# Altium PCB PCB.PcbDoc
Units mil, origin at the board's own origin, x right, y up, seen from the top; angles counter-clockwise.
Board outline 6000 x 4000 mil, 2 copper layers (Top Layer, Bottom Layer); 231 components, 132 nets, 529 pads, 0 vias.
Unrouted connection lines stored in the file: 391.
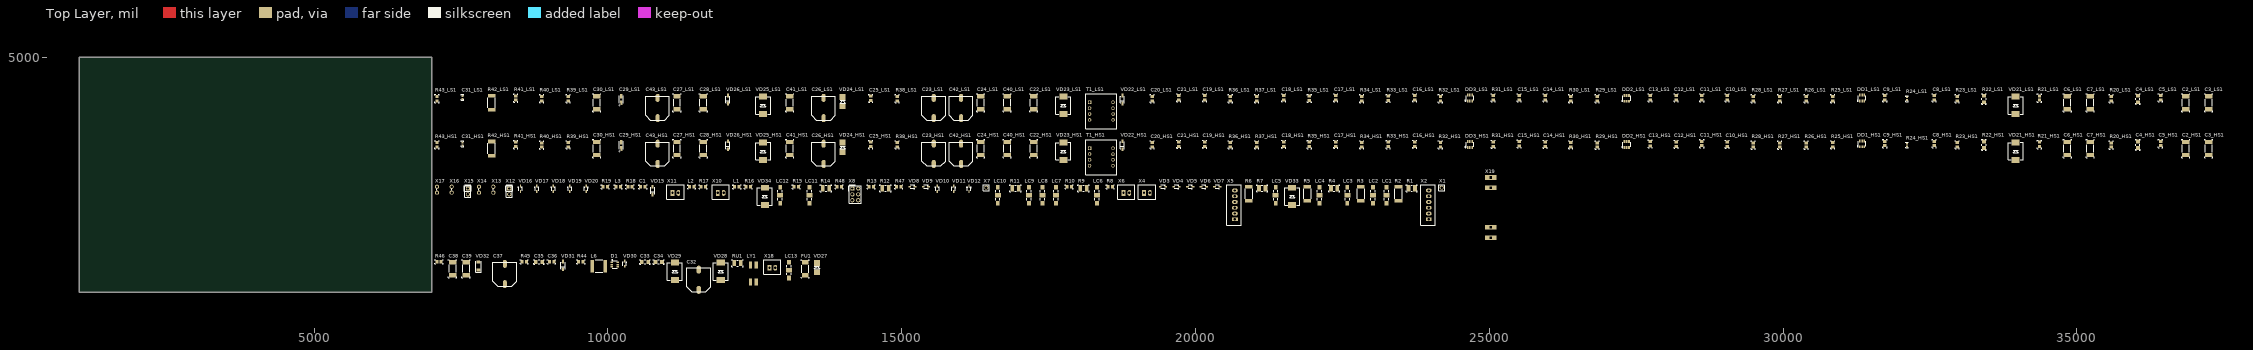
[diagram p0: Top Layer view]
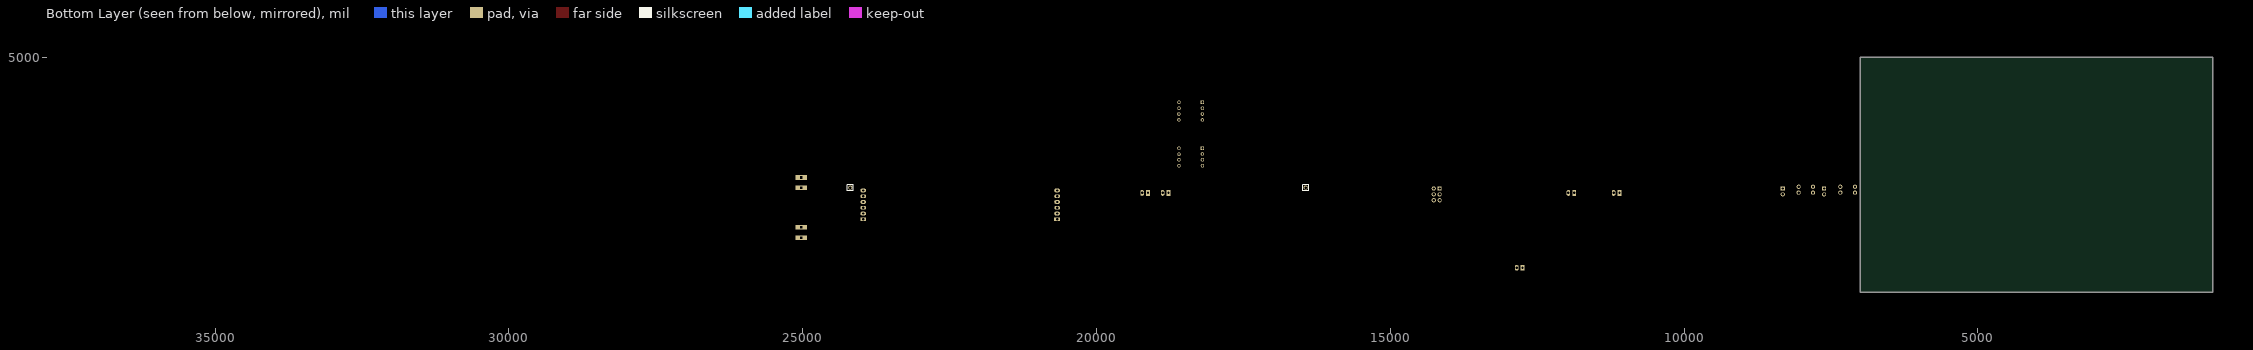
[diagram p1: Bottom Layer view, seen from below]

## Layer stack, top to bottom
Top Solder: solder mask 0.4, Solder Resist, Dk 3.5
Top Layer: signal copper 1.4
Dielectric 1: dielectric 12.6, FR-4, Dk 4.8
Bottom Layer: signal copper 1.4
Bottom Solder: solder mask 0.4, Solder Resist, Dk 3.5

## Board outline
1000,1000 7000,1000 7000,5000 1000,5000

## Design rules (kind name [scope] priority, off if disabled: settings)
Clearance [All] p1: gap=10 ignorepadtopadclearanceinfootprint=FALSE
DiffPairsRouting [All] p1: maxlimit=10 minlimit=10 mostfreqgap=10 toplayer_minwidth=15 toplayer_maxwidth=15 toplayer_prefwidth=15 bottomlayer_minwidth=15 bottomlayer_maxwidth=15 bottomlayer_prefwidth=15 maxuncoupledlength=500
PolygonConnect [All] p1: connectstyle=Relief reliefconductorwidth=10 reliefentries=4 polygonreliefangle="90 Angle" airgapwidth=10
RoutingVias [All] p1: holewidth=28 width=50 viastyle="Through Hole" minholewidth=28 minwidth=50 maxholewidth=28 maxwidth=50
SolderMaskExpansion [All] p1: expansion=4 istentingtop=FALSE
SupplyNets "Schematic Supply Nets_2" [InNet('VCC1_HS1')] p1: voltage=0.000
SupplyNets "Schematic Supply Nets_1" [InNet('+12_HS1')] p2: voltage=0.000
SupplyNets "Schematic Supply Nets" [InNet('GND1')] p3: voltage=0.000
Width [All] p1: maxlimit=10 minlimit=10 preferedwidth=10
29 further rules are at their usual default settings.

## Classes and differential pairs
channel class Gate_Driver: HS1 LS1
component class TOP_LEVEL: C1 L1 L2 L3 LC1 LC2 LC3 LC4 LC5 LC6 LC7 LC8 LC9 LC10 LC11 LC12 R1 R2 R3 R4 R5 R6 R7 R8 R9 R10 R11 R12 R13 R14 R15 R16 R17 R18 R19 R47 R48 VD3 VD4 VD5 VD6 VD7 VD8 VD9 VD10 VD11 VD12 VD15 VD16 VD17 VD18 VD19 VD20 VD33 VD34 X1 X2 X4 X5 X6 X7 X8 X10 X11 X12 X13 X14 X15 X16 X17 X19
component class LS1: C2_LS1 C3_LS1 C4_LS1 C5_LS1 C6_LS1 C7_LS1 C8_LS1 C9_LS1 C10_LS1 C11_LS1 C12_LS1 C13_LS1 C14_LS1 C15_LS1 C16_LS1 C17_LS1 C18_LS1 C19_LS1 C20_LS1 C21_LS1 C22_LS1 C23_LS1 C24_LS1 C25_LS1 C26_LS1 C27_LS1 C28_LS1 C29_LS1 C30_LS1 C31_LS1 C40_LS1 C41_LS1 C42_LS1 C43_LS1 DD1_LS1 DD2_LS1 DD3_LS1 R20_LS1 R21_LS1 R22_LS1 R23_LS1 R24_LS1 R25_LS1 R26_LS1 R27_LS1 R28_LS1 R29_LS1 R30_LS1 R31_LS1 R32_LS1 R33_LS1 R34_LS1 R35_LS1 R36_LS1 R37_LS1 R38_LS1 R39_LS1 R40_LS1 R41_LS1 R42_LS1 R43_LS1 T1_LS1 TP1_LS1 U1_LS1 VD21_LS1 VD22_LS1 VD23_LS1 VD24_LS1 VD25_LS1 VD26_LS1 VT1_LS1 VT2_LS1
component class HS1: C2_HS1 C3_HS1 C4_HS1 C5_HS1 C6_HS1 C7_HS1 C8_HS1 C9_HS1 C10_HS1 C11_HS1 C12_HS1 C13_HS1 C14_HS1 C15_HS1 C16_HS1 C17_HS1 C18_HS1 C19_HS1 C20_HS1 C21_HS1 C22_HS1 C23_HS1 C24_HS1 C25_HS1 C26_HS1 C27_HS1 C28_HS1 C29_HS1 C30_HS1 C31_HS1 C40_HS1 C41_HS1 C42_HS1 C43_HS1 DD1_HS1 DD2_HS1 DD3_HS1 R20_HS1 R21_HS1 R22_HS1 R23_HS1 R24_HS1 R25_HS1 R26_HS1 R27_HS1 R28_HS1 R29_HS1 R30_HS1 R31_HS1 R32_HS1 R33_HS1 R34_HS1 R35_HS1 R36_HS1 R37_HS1 R38_HS1 R39_HS1 R40_HS1 R41_HS1 R42_HS1 R43_HS1 T1_HS1 TP1_HS1 U1_HS1 VD21_HS1 VD22_HS1 VD23_HS1 VD24_HS1 VD25_HS1 VD26_HS1 VT1_HS1 VT2_HS1
component class Designator: C32 C33 C34 C35 C36 C37 C38 C39 D1 FU1 L6 LC13 LY1 R44 R45 R46 RU1 VD27 VD28 VD29 VD30 VD31 VD32 X18
differential pair OCP_LS1: +OCP_LS1_P -OCP_LS1_N
differential pair OCP_HS1: +OCP_HS1_P -OCP_HS1_N
differential pair ISENSE_LS1: +ISENSE_LS1_P -ISENSE_LS1_N
differential pair ISENSE_HS1: +ISENSE_HS1_P -ISENSE_HS1_N

## Components (designator, comment, footprint, x,y, rotation, side; value= is the part's Value field where it differs from the comment)
C1 "10nF" 2012[0805] 10595,2795 r0 top value=0.1
C2_HS1 "1uF" 6332[2512] 36855,3445 r90 top value=0.1 (schematic designator C2)
C2_LS1 "1uF" 6332[2512] 36855,4225 r90 top value=0.1 (schematic designator C2)
C3_HS1 "10uF" 6332[2512] 37245,3445 r90 top value=0.1 (schematic designator C3)
C3_LS1 "10uF" 6332[2512] 37245,4225 r90 top value=0.1 (schematic designator C3)
C4_HS1 "2.2uF" 3216[1206] 36040,3510 r90 top value=0.1 (schematic designator C4)
C4_LS1 "2.2uF" 3216[1206] 36040,4290 r90 top value=0.1 (schematic designator C4)
C5_HS1 "100nF" 2012[0805] 36425,3530 r90 top value=0.1 (schematic designator C5)
C5_LS1 "100nF" 2012[0805] 36425,4310 r90 top value=0.1 (schematic designator C5)
C6_HS1 "1uF" 6332[2512] 34840,3445 r90 top value=0.1 (schematic designator C6)
C6_LS1 "1uF" 6332[2512] 34840,4225 r90 top value=0.1 (schematic designator C6)
C7_HS1 "10uF" 6332[2512] 35230,3445 r90 top value=0.1 (schematic designator C7)
C7_LS1 "10uF" 6332[2512] 35230,4225 r90 top value=0.1 (schematic designator C7)
C8_HS1 "100pF" 2012[0805] 32575,3530 r90 top value=0.1 (schematic designator C8)
C8_LS1 "100pF" 2012[0805] 32575,4310 r90 top value=0.1 (schematic designator C8)
C9_HS1 "100nF" 2012[0805] 31735,3530 r90 top value=0.1 (schematic designator C9)
C9_LS1 "100nF" 2012[0805] 31735,4310 r90 top value=0.1 (schematic designator C9)
C10_HS1 "100nF" 2012[0805] 29050,3520 r90 top value=0.1 (schematic designator C10)
C10_LS1 "100nF" 2012[0805] 29050,4310 r90 top value=0.1 (schematic designator C10)
C11_HS1 "47pF" 2012[0805] 28620,3530 r90 top value=0.1 (schematic designator C11)
C11_LS1 "47pF" 2012[0805] 28620,4310 r90 top value=0.1 (schematic designator C11)
C12_HS1 "47pF" 2012[0805] 28180,3520 r90 top value=0.1 (schematic designator C12)
C12_LS1 "47pF" 2012[0805] 28180,4310 r90 top value=0.1 (schematic designator C12)
C13_HS1 "47pF" 2012[0805] 27740,3525 r90 top value=0.1 (schematic designator C13)
C13_LS1 "47pF" 2012[0805] 27740,4310 r90 top value=0.1 (schematic designator C13)
C14_HS1 "47pF" 2012[0805] 25950,3520 r90 top value=0.1 (schematic designator C14)
C14_LS1 "47pF" 2012[0805] 25950,4310 r90 top value=0.1 (schematic designator C14)
C15_HS1 "47pF" 2012[0805] 25510,3525 r90 top value=0.1 (schematic designator C15)
C15_LS1 "47pF" 2012[0805] 25510,4310 r90 top value=0.1 (schematic designator C15)
C16_HS1 "1nF" 2012[0805] 23730,3520 r90 top value=0.1 (schematic designator C16)
C16_LS1 "1nF" 2012[0805] 23730,4310 r90 top value=0.1 (schematic designator C16)
C17_HS1 "4.7uF" 2012[0805] 22390,3520 r90 top value=0.1 (schematic designator C17)
C17_LS1 "4.7uF" 2012[0805] 22390,4310 r90 top value=0.1 (schematic designator C17)
C18_HS1 "47pF" 2012[0805] 21500,3520 r90 top value=0.1 (schematic designator C18)
C18_LS1 "47pF" 2012[0805] 21500,4310 r90 top value=0.1 (schematic designator C18)
C19_HS1 "47pF" 2012[0805] 20155,3520 r90 top value=0.1 (schematic designator C19)
C19_LS1 "47pF" 2012[0805] 20155,4310 r90 top value=0.1 (schematic designator C19)
C20_HS1 "47pF" 2012[0805] 19265,3510 r90 top value=0.1 (schematic designator C20)
C20_LS1 "47pF" 2012[0805] 19265,4295 r90 top value=0.1 (schematic designator C20)
C21_HS1 "1nF" 2012[0805] 19715,3520 r90 top value=0.1 (schematic designator C21)
C21_LS1 "1nF" 2012[0805] 19715,4310 r90 top value=0.1 (schematic designator C21)
C22_HS1 "4.7uF" 6332[2512] 17245,3445 r90 top value=0.1 (schematic designator C22)
C22_LS1 "4.7uF" 6332[2512] 17245,4225 r90 top value=0.1 (schematic designator C22)
C23_HS1 "220uF" "ECAP 220 50V" 15380,3150 r0 top (schematic designator C23)
C23_LS1 "220uF" "ECAP 220 50V" 15380,3930 r0 top (schematic designator C23)
C24_HS1 "4.7uF" 6332[2512] 16345,3445 r90 top value=0.1 (schematic designator C24)
C24_LS1 "4.7uF" 6332[2512] 16345,4225 r90 top value=0.1 (schematic designator C24)
C25_HS1 "47nF" 2012[0805] 14475,3515 r90 top value=0.1 (schematic designator C25)
C25_LS1 "47nF" 2012[0805] 14475,4300 r90 top value=0.1 (schematic designator C25)
C26_HS1 "220uF" "ECAP 220 50V" 13505,3150 r0 top (schematic designator C26)
C26_LS1 "220uF" "ECAP 220 50V" 13505,3930 r0 top (schematic designator C26)
C27_HS1 "4.7uF" 6332[2512] 11175,3445 r90 top value=0.1 (schematic designator C27)
C27_LS1 "4.7uF" 6332[2512] 11175,4225 r90 top value=0.1 (schematic designator C27)
C28_HS1 "4.7uF" 6332[2512] 11625,3445 r90 top value=0.1 (schematic designator C28)
C28_LS1 "4.7uF" 6332[2512] 11625,4225 r90 top value=0.1 (schematic designator C28)
C29_HS1 "220uF" A(3216) 10225,3500 r90 top (schematic designator C29)
C29_LS1 "220uF" A(3216) 10225,4280 r90 top (schematic designator C29)
C30_HS1 "100nF" 6332[2512] 9810,3445 r90 top value=0.1 (schematic designator C30)
C30_LS1 "100nF" 6332[2512] 9810,4225 r90 top value=0.1 (schematic designator C30)
C31_HS1 "10nF" 1005[0402] 7525,3525 r90 top value=0.1 (schematic designator C31)
C31_LS1 "10nF" 1005[0402] 7525,4315 r90 top value=0.1 (schematic designator C31)
C32 "*" "ECAP 220 50V" 11379.65,1007.05 r0 top
C33 "0.1м" 3216[1206] 10630,1515 r0 top
C34 "0.1м" 3216[1206] 10865,1515 r0 top
C35 "10u" 3216[1206] 8825,1515 r0 top value=0.1м
C36 "0u1" 2012[0805] 9040,1520 r0 top value=0.1м
C37 "220u" "ECAP 220 50V" 8080,1105 r0 top
C38 "10u" 6332[2512] 7355,1400 r90 top value=0.1м
C39 "10u" 6332[2512] 7585,1400 r90 top value=0.1м
C40_HS1 "10uF" 6332[2512] 16795,3445 r90 top value=0.1 (schematic designator C40)
C40_LS1 "10uF" 6332[2512] 16795,4225 r90 top value=0.1 (schematic designator C40)
C41_HS1 "10uF" 6332[2512] 13095,3445 r90 top value=0.1 (schematic designator C41)
C41_LS1 "10uF" 6332[2512] 13095,4225 r90 top value=0.1 (schematic designator C41)
C42_HS1 "220uF" "ECAP 220 50V" 15845,3150 r0 top (schematic designator C42)
C42_LS1 "220uF" "ECAP 220 50V" 15845,3930 r0 top (schematic designator C42)
C43_HS1 "220uF" "ECAP 220 50V" 10680,3150 r0 top (schematic designator C43)
C43_LS1 "220uF" "ECAP 220 50V" 10680,3930 r0 top (schematic designator C43)
D1 "MCP16301HT-E/CH" SOT23-6 10115,1470 r0 top
DD1_HS1 "SN74LVC2G17DBVR" SOT23-6 31345,3525 r90 top (schematic designator DD1)
DD1_LS1 "SN74LVC2G17DBVR" SOT23-6 31345,4305 r90 top (schematic designator DD1)
DD2_HS1 "SN74LVC2G17DBVR" SOT23-6 27340,3515 r90 top (schematic designator DD2)
DD2_LS1 "SN74LVC2G17DBVR" SOT23-6 27340,4300 r90 top (schematic designator DD2)
DD3_HS1 "SN74LVC2G17DBVR" SOT23-6 24670,3515 r90 top (schematic designator DD3)
DD3_LS1 "SN74LVC2G17DBVR" SOT23-6 24670,4305 r90 top (schematic designator DD3)
FU1 "*" 2410 13360,1400 r90 top
L1 "*" 2012[0805] 12195,2795 r0 top
L2 "*" 2012[0805] 11425,2795 r0 top
L3 "600ohm" 2012[0805] 10175,2795 r0 top
L6 "15uH" IND5750 9845,1445 r0 top
LC1 "" NFE61PT102E1H9L 23250,2650 r90 top
LC2 "" NFE61PT102E1H9L 23020,2650 r90 top
LC3 "" NFE61PT102E1H9L 22585,2650 r90 top
LC4 "" NFE61PT102E1H9L 22110,2650 r90 top
LC5 "" NFE61PT102E1H9L 21365,2650 r90 top
LC6 "" NFE61PT102E1H9L 18325,2650 r90 top
LC7 "" NFE61PT102E1H9L 17625,2650 r90 top
LC8 "" NFE61PT102E1H9L 17395,2650 r90 top
LC9 "" NFE61PT102E1H9L 17165,2650 r90 top
LC10 "" NFE61PT102E1H9L 16635,2650 r90 top
LC11 "" NFE61PT102E1H9L 13430,2650 r90 top
LC12 "" NFE61PT102E1H9L 12930,2650 r90 top
LC13 "" NFE61PT102E1H9L 13080,1375 r90 top
LY1 "Value" B82793S0513N201 12475,1315 r90 top
R1 "390k" 3225[1210] 23680,2770 r0 top
R2 "3.3" 2512 23455,2675 r90 top
R3 "3.3" 2512 22815,2675 r90 top
R4 "390k" 3225[1210] 22360,2770 r0 top
R5 "3.3" 2512 21905,2675 r90 top
R6 "3.3" 2512 20910,2675 r90 top
R7 "390k" 3225[1210] 21135,2770 r0 top
R8 "*" 2012[0805] 18550,2795 r0 top
R9 "390k" 3225[1210] 18095,2770 r0 top
R10 "*" 2012[0805] 17850,2795 r0 top
R11 "390k" 3225[1210] 16935,2770 r0 top
R12 "390k" 3225[1210] 14725,2770 r0 top
R13 "3.3" 2012[0805] 14480,2795 r0 top
R14 "390k" 3225[1210] 13710,2770 r0 top
R15 "3.3" 2012[0805] 13205,2795 r0 top
R16 "680" 2012[0805] 12390,2795 r0 top
R17 "23.7k" 2012[0805] 11620,2795 r0 top
R18 "*" 2012[0805] 10375,2795 r0 top
R19 "*" 2012[0805] 9955,2795 r0 top
R20_HS1 "10k" 2012[0805] 35585,3505 r90 top (schematic designator R20)
R20_LS1 "10k" 2012[0805] 35585,4295 r90 top (schematic designator R20)
R21_HS1 "10k" 2012[0805] 34365,3515 r90 top (schematic designator R21)
R21_LS1 "10k" 2012[0805] 34365,4305 r90 top (schematic designator R21)
R22_HS1 "2.2k" 3216[1206] 33420,3510 r90 top (schematic designator R22)
R22_LS1 "2.2k" 3216[1206] 33420,4290 r90 top (schematic designator R22)
R23_HS1 "1k" 2012[0805] 32965,3510 r90 top (schematic designator R23)
R23_LS1 "1k" 2012[0805] 32965,4295 r90 top (schematic designator R23)
R24_HS1 "100k" 1005[0402] 32110,3505 r90 top (schematic designator R24)
R24_LS1 "100k" 1005[0402] 32110,4295 r90 top (schematic designator R24)
R25_HS1 "100" 2012[0805] 30845,3510 r90 top (schematic designator R25)
R25_LS1 "100" 2012[0805] 30845,4295 r90 top (schematic designator R25)
R26_HS1 "4.7k" 2012[0805] 30395,3505 r90 top (schematic designator R26)
R26_LS1 "4.7k" 2012[0805] 30395,4295 r90 top (schematic designator R26)
R27_HS1 "10k" 2012[0805] 29945,3505 r90 top (schematic designator R27)
R27_LS1 "10k" 2012[0805] 29945,4295 r90 top (schematic designator R27)
R28_HS1 "10k" 2012[0805] 29495,3505 r90 top (schematic designator R28)
R28_LS1 "10k" 2012[0805] 29495,4295 r90 top (schematic designator R28)
R29_HS1 "10k" 2012[0805] 26840,3505 r90 top (schematic designator R29)
R29_LS1 "10k" 2012[0805] 26840,4295 r90 top (schematic designator R29)
R30_HS1 "100" 2012[0805] 26390,3510 r90 top (schematic designator R30)
R30_LS1 "100" 2012[0805] 26390,4295 r90 top (schematic designator R30)
R31_HS1 "100" 2012[0805] 25070,3520 r90 top (schematic designator R31)
R31_LS1 "100" 2012[0805] 25070,4310 r90 top (schematic designator R31)
R32_HS1 "100" 2012[0805] 24170,3510 r90 top (schematic designator R32)
R32_LS1 "100" 2012[0805] 24170,4295 r90 top (schematic designator R32)
R33_HS1 "10" 2012[0805] 23280,3515 r90 top (schematic designator R33)
R33_LS1 "10" 2012[0805] 23280,4300 r90 top (schematic designator R33)
R34_HS1 "100" 2012[0805] 22830,3510 r90 top (schematic designator R34)
R34_LS1 "100" 2012[0805] 22830,4295 r90 top (schematic designator R34)
R35_HS1 "10" 2012[0805] 21940,3515 r90 top (schematic designator R35)
R35_LS1 "10" 2012[0805] 21940,4300 r90 top (schematic designator R35)
R36_HS1 "10k" 2012[0805] 20595,3510 r90 top (schematic designator R36)
R36_LS1 "10k" 2012[0805] 20595,4295 r90 top (schematic designator R36)
R37_HS1 "220k" 2012[0805] 21045,3510 r90 top (schematic designator R37)
R37_LS1 "220k" 2012[0805] 21045,4295 r90 top (schematic designator R37)
R38_HS1 "1.2k" 2012[0805] 14925,3510 r90 top (schematic designator R38)
R38_LS1 "1.2k" 2012[0805] 14925,4295 r90 top (schematic designator R38)
R39_HS1 "4.7" 2012[0805] 9325,3510 r90 top (schematic designator R39)
R39_LS1 "4.7" 2012[0805] 9325,4295 r90 top (schematic designator R39)
R40_HS1 "10k" 2012[0805] 8870,3505 r90 top (schematic designator R40)
R40_LS1 "10k" 2012[0805] 8870,4295 r90 top (schematic designator R40)
R41_HS1 "10" 2012[0805] 8430,3515 r90 top (schematic designator R41)
R41_LS1 "10" 2012[0805] 8430,4305 r90 top (schematic designator R41)
R42_HS1 "0.2" 2512 8020,3445 r90 top (schematic designator R42)
R42_LS1 "0.2" 2512 8020,4225 r90 top (schematic designator R42)
R43_HS1 "10" 2012[0805] 7090,3510 r90 top (schematic designator R43)
R43_LS1 "10" 2012[0805] 7090,4295 r90 top (schematic designator R43)
R44 "1М" 2012[0805] 9540,1520 r0 top
R45 "31.2k" 2012[0805] 8575,1520 r0 top
R46 "10k" 2012[0805] 7125,1520 r0 top
R47 "3.3" 2012[0805] 14950,2795 r0 top
R48 "3.3" 2012[0805] 13935,2795 r0 top
RU1 "*" 3225[1210] 12205,1495 r0 top
T1_HS1 "transformer 3coil" "E 13/7/4" 18400,3300 r0 top (schematic designator T1)
T1_LS1 "transformer 3coil" "E 13/7/4" 18400,4080 r0 top (schematic designator T1)
VD3 "*" SOD-323 19445,2795 r0 top
VD4 "*" SOD-323 19675,2795 r0 top
VD5 "*" SOD-323 19910,2795 r0 top
VD6 "*" SOD-323 20140,2795 r0 top
VD7 "PESD3V3L1BA" SOD-323 20370,2795 r0 top
VD8 "*" SOD-323 15180,2795 r0 top
VD9 "*" SOD-323 15410,2795 r0 top
VD10 "*" SOD-323 15605,2760 r90 top
VD11 "*" SOD-323 15885,2760 r90 top
VD12 "PESD3V3L1BA" SOD-323 16145,2760 r90 top
VD15 "*" SOD-123 10760,2730 r90 top
VD16 "*" SOD-323 8510,2760 r90 top
VD17 "*" SOD-323 8790,2760 r90 top
VD18 "*" SOD-323 9070,2760 r90 top
VD19 "*" SOD-323 9350,2760 r90 top
VD20 "PESD3V3L1BA" SOD-323 9630,2760 r90 top
VD21_HS1 "smc" SMС 33960,3400 r90 top (schematic designator VD21)
VD21_LS1 "smc" SMС 33960,4180 r90 top (schematic designator VD21)
VD22_HS1 "STPS1L60ZFY" SOD-123 18755,3500 r90 top (schematic designator VD22)
VD22_LS1 "STPS1L60ZFY" SOD-123 18755,4280 r90 top (schematic designator VD22)
VD23_HS1 "" SMС 17750,3400 r90 top (schematic designator VD23)
VD23_LS1 "" SMС 17750,4180 r90 top (schematic designator VD23)
VD24_HS1 "S1M-E3/61T" SMB 13995,3465 r90 top (schematic designator VD24)
VD24_LS1 "S1M-E3/61T" SMB 13995,4245 r90 top (schematic designator VD24)
VD25_HS1 "" SMС 12640,3400 r90 top (schematic designator VD25)
VD25_LS1 "" SMС 12640,4180 r90 top (schematic designator VD25)
VD26_HS1 "" SOD-123 12040,3500 r90 top (schematic designator VD26)
VD26_LS1 "" SOD-123 12040,4280 r90 top (schematic designator VD26)
VD27 "*" SMB 13560,1420 r90 top
VD28 "*" SMС 11920,1355 r90 top
VD29 "12V" SMС 11140,1355 r90 top
VD30 "1N4448WS" SOD-323 10285,1485 r90 top
VD31 "40V shotkey" SOD-123 9235,1455 r90 top
VD32 "3V3" SOD-80 7795,1445 r90 top
VD33 "" SMС 21645,2630 r90 top
VD34 "" SMС 12670,2630 r90 top
X1 "PBS-1-2.54" PIN_1 24190,2780 r0 top
X2 "PLS-6-2.54" CWF-6 23970,2240 r90 top
X4 "трансформатор тока" CWF-2 19125,2690 r0 top
X5 "PLS-6-2.54" CWF-6 20670,2240 r90 top
X6 "NTC" CWF-2 18775,2690 r0 top
X7 "PBS-1-2.54" PIN_1 16440,2780 r0 top
X8 "CWF-6" PLD-6-2.54 14160,2765 r90 top
X10 "трансформатор тока" CWF-2 11870,2690 r0 top
X11 "NTC" CWF-2 11100,2690 r0 top
X12 "U.FL-R-SMT-1" PIN_2 8320,2765 r0 top
X13 "PLS-2" PIN_JUMPER 8050,2795 r0 top
X14 "PLS-2" PIN_JUMPER 7805,2795 r0 top
X15 "U.FL-R-SMT-1" PIN_2 7615,2765 r0 top
X16 "PLS-2" PIN_JUMPER 7340,2795 r0 top
X17 "PLS-2" PIN_JUMPER 7090,2795 r0 top
X18 "PBS-2-2.54" CWF-2 12750,1415 r0 top
X19 "IGBT" IGBT 25025,2440 r0 top

## Footprints (in the part's own frame and the unit in brackets; to place one, negate y for a bottom-side part, rotate by r counter-clockwise, add the part's x,y. Pads: shape width x height; smd on the part's side, far side on the other; paste and mask are expansions set on the pad)
1005[0402] [mm] "Chip Resistor; Body 1.1 x 0.5 mm (LxW typ)"
  rect 0.9x0.7 smd: 1(-0.65,0) 2(0.65,0)
  silkscreen extent -1.27,-0.51 1.27,0.51, body extent -0.51,-0.25 0.51,0.25, height 0.41
2012[0805] [mm] "Chip Resistor; Body 2.0 x 1.3 mm (LxW typ)"
  rect 1.3x1.5 smd: 1(-0.95,0) 2(0.95,0)
  silkscreen extent -1.78,-0.89 1.78,0.89, body extent -1.02,-0.64 1.02,0.64, height 0.5
2410 [mm]
  rect 1.8x2.8 smd: 1(-2.847,0.102) 2(2.753,0.102)
  silkscreen extent -3.98,-1.68 3.89,1.88, body extent -3.22,-1.42 3.13,1.63, height 0.71
2512 [mm]
  rect 1.6x3.27 smd: 1(-3.055,0) 2(3.055,0)
  silkscreen extent -2.2,-1.63 2.2,1.63
3216[1206] [mm] "Chip Resistor; Body 3.2 x 1.6 mm (LxW typ)"
  rect 1.6x1.8 smd: 1(-1.4,0) 2(1.4,0)
  silkscreen extent -2.29,-1.02 2.29,1.02, body extent -1.52,-0.76 1.52,0.76, height 0.5
3225[1210] [mm] "Chip Resistor; Body 3.2 x 2.5 mm (LxW typ)"
  rect 1.6x2.7 smd: 1(-1.4,0) 2(1.4,0)
  silkscreen extent -2.41,-1.52 2.41,1.52, body extent -1.52,-1.29 1.52,1.25, height 0.71
6332[2512] [mm] "Chip Resistor; Body 6.3 x 3.2 mm (LxW typ)"
  rect 1.8x3.2 smd: 1(-2.8,0) 2(2.8,0)
  silkscreen extent -3.94,-1.78 3.94,1.78, body extent -3.17,-1.52 3.17,1.52, height 0.71
A(3216) [mm] "Capacitor, SM Tantalum; Body 3.2 x 1.6 mm (LxW typ)"
  rect 2x1.2 smd: 1(-1.4,0) 2(1.4,0)
  silkscreen extent -1.7,-0.9 1.7,0.9, body extent -1.7,-0.91 1.7,0.89, height 1.78
B82793S0513N201 [mm]
  rect 3x1.4 smd: 1(-3.675,1.25) 2(-3.675,-1.25) 3(3.675,1.25) 4(3.675,-1.25)
CWF-2 [mm]
  rect 1.6x2.5 hole 1: 1(0,0)
  oval 1.6x2.5 hole 1: 2(2.5,0)
  silkscreen extent -2.45,-2.85 4.95,3.5, body extent -2.45,-2.85 4.95,3.47, height 8
CWF-6 [mm]
  rect 1.6x2.5 hole 1: 1(0,0)
  oval 1.6x2.5 hole 1: 2(2.5,0) 3(5,0) 4(7.5,0) 5(10,0) 6(12.5,0)
  silkscreen extent -2.45,-2.85 14.95,3.5, body extent -2.42,-2.83 14.95,3.5, height 8
"E 13/7/4" [mm]
  rect 1.5x1.5 hole 1: 1(-5.16,3.87)
  round 1.5 hole 1: 2(-5.16,1.33) 3(-5.16,-1.21) 4(-5.16,-3.75) 5(5,-3.75) 6(5,-1.21) 7(4.965,1.295) 8(5,3.87)
  silkscreen extent -6.7,-7.55 6.7,7.55
"ECAP 220 50V" [mm] "TO, Thru-Hole, Vertical, Heatsink Mounted; 3 In-Line Leads; Pitch 2.54 mm"
  oval 1.8x3.5 smd: 1(4.2,0.8) 2(4.2,9.6)
  silkscreen extent -1,0 9.3,10.3, body extent -0.97,0 9.3,10.28, height 10.5
IGBT [mm] "STARPOWER"
  rect 5x2 hole 0.9 square: 1(0,13) 2(0,8.5) 3(0,-13) 4(0,-8.5)
IND5750 [mm] "Chip Inductor, Body 5.7x5.0(2220) mm, IPC Low Density"
  rect 1.6x5.4 smd: 1(-2.8,0) 2(2.8,0)
  silkscreen extent -1.6,-2.73 1.6,2.73, body extent -2.92,-2.54 2.95,2.54, height 4.7
NFE61PT102E1H9L [mm] "1000пф, 2706, Фильтр ЭМП"
  rect 2x1.6 smd: 1(-3.4,0) 3(3.4,0)
  rect 2x2.6 smd paste-2: 2(0,0)
  silkscreen extent -2.08,-0.95 2.08,0.95
PIN_1 [mm] "Connector 1 pin; Plug"
  round 1.8 hole 1: 1(0,0)
  silkscreen extent -1.27,-1.27 1.27,1.27, body extent -1.27,-1.27 1.27,1.27, height 8.8
PIN_2 [mm] "Connector 2 pin; Plug"
  rect 1.8x1.8 hole 1: 1(0,0)
  round 1.8 hole 1: 2(0,-2.54)
  silkscreen extent -1.52,-3.81 1.52,1.52, body extent -1.27,-3.81 1.27,1.27, height 8.8
PIN_JUMPER [mm] "Connector 2 pin; Plug"
  round 1.8 hole 1: 1(0,0) 2(0,-2.54)
  silkscreen extent 0,-1.5 0,-0.98
PLD-6-2.54 [mm] "Connector 6 pin; Plug"
  rect 1.8x1.8 hole 1: 1(0,0)
  round 1.8 hole 1: 2(0,-2.54) 3(-2.54,0) 4(-2.54,-2.54) 5(-5.08,0) 6(-5.08,-2.54)
  silkscreen extent -6.35,-3.81 1.52,1.52, body extent -6.35,-3.81 1.27,1.27, height 8.8
SMB [mil] "Diode"
  rect 100x100 smd: 1(-80,0) 2(80,0)
  silkscreen extent -25,-45 20,45, body extent -104,-70 104,70, height 85
SMС [mm] "Diode"
  rect 2.54x3.5 smd: 1(-3.75,0) 2(3.75,0)
  silkscreen extent -3.77,-3.25 3.77,3.25, body extent -4.16,-2.95 4.16,2.95, height 2.31
SOD-80 [mm]
  rrect25% 1.2x1.7 smd: A(1.7,0) K(-1.7,0)
  silkscreen extent -2.65,-1.2 2,1.2, body extent -1.76,-0.74 1.74,0.74, height 1.46
SOD-123 [mm] "SOD-123; 2 Leads; Body 2.7 x 1.6 mm, (LxW)"
  rect 1.6x0.85 smd: 1(1.7,0) 2(-1.7,0)
  silkscreen extent -1.45,-0.9 1.45,0.9, body extent -1.37,-1 1.38,1, height 1.35
SOD-323 [mm] "SOD-323/SC-76; 2 Leads; Body 1.7 x 1.3 mm, (LxW)"
  rect 1.15x0.55 smd: 1(-1.175,0) 2(1.175,0)
  silkscreen extent -0.95,-0.87 0.95,0.87, body extent -0.89,-0.64 0.89,0.64, height 1.1
SOT23-6 [mm] "SOT-23/SC-74A; 5 Leads; Body 3 x 3 mm, inc. leads (LxW max)"
  rect 1.2x0.7 smd: 1(-1.27,0.953) 2(-1.27,0) 3(-1.27,-0.953) 4(1.27,-0.953) 5(1.27,0) 6(1.27,0.953)
  silkscreen extent -1.37,-1.65 1.02,2.12, body extent -1.4,-1.45 1.4,1.45, height 1.55

## Part data
C1 C2_HS1 C2_LS1 C3_HS1 C3_LS1 C4_HS1 C4_LS1 C5_HS1 C5_LS1 C6_HS1 C6_LS1 C7_HS1 C7_LS1 C8_HS1 C8_LS1 C9_HS1 C9_LS1 C10_HS1 C10_LS1 C11_HS1 C11_LS1 C12_HS1 C12_LS1 C13_HS1 C13_LS1 C14_HS1 C14_LS1 C15_HS1 C15_LS1 C16_HS1 C16_LS1 C17_HS1 C17_LS1 C18_HS1 C18_LS1 C19_HS1 C19_LS1 C20_HS1 C20_LS1 C21_HS1 C21_LS1 C22_HS1 C22_LS1 C24_HS1 C24_LS1 C25_HS1 C25_LS1 C27_HS1 C27_LS1 C28_HS1 C28_LS1 C30_HS1 C30_LS1 C31_HS1 C31_LS1 C40_HS1 C40_LS1 C41_HS1 C41_LS1: library part C-4del, "Конденсатор", Manufacturer=Murata, ManufacturerPartNumber="GRM21B X7R 104 50V", Power/Voltage=50В, Tolerance=10%, Specification=K, TKE/TKC=X7R, Type=Конденсатор
C23_HS1 C23_LS1 C26_HS1 C26_LS1 C29_HS1 C29_LS1 C32 C37 C42_HS1 C42_LS1 C43_HS1 C43_LS1: library part "C pol", "Конденсатор электролитический", Specification=K, Type=Конденсатор
C33 C34 C35 C36 C38 C39: library part "C nonpol", "Конденсатор", Manufacturer=Murata, ManufacturerPartNumber=GRM21_R71H104, Power/Voltage=50В, Tolerance=10%, Specification=K, TKE/TKC=X7R, Type=Конденсатор
D1: library part MCP16301, "DC/DC regulator", Manufacturer=Microchip, ManufacturerPartNumber=MCP16301HT-E/CH, Type=Микросхема
DD1_HS1 DD1_LS1 DD2_HS1 DD2_LS1 DD3_HS1 DD3_LS1: library part SN74LVC
FU1: library part FU, "Вставка плавкая", ManufacturerPartNumber=ВП1-2, Power/Voltage="0.25 А, 250 В", Specification=K, TU/GOST=ОЮ0.480.003ТУ-Р, Type="Вставка плавкая"
L1 L2 L3 L6: library part "L with core", "Дроссель", Specification=K, Type=Индуктивность
LC1 LC2 LC3 LC4 LC5 LC6 LC7 LC8 LC9 LC10 LC11 LC12 LC13: library part "Фильтр ЭМП LCL"
LY1: library part "Дроссель синфазный"
R1 R2 R3 R4 R5 R6 R7 R9 R11 R12 R13 R14 R15 R17 R47 R48: library part R, "Резистор", Manufacturer=Yageo, ManufacturerPartNumber=RC0805JR-07120R, Power/Voltage=0.125Вт, Tolerance=5%, Specification=K, Type=Резистор
R8 R10 R16 R18 R19 R20_HS1 R20_LS1 R21_HS1 R21_LS1 R22_HS1 R22_LS1 R23_HS1 R23_LS1 R24_HS1 R24_LS1 R25_HS1 R25_LS1 R26_HS1 R26_LS1 R27_HS1 R27_LS1 R28_HS1 R28_LS1 R29_HS1 R29_LS1 R30_HS1 R30_LS1 R31_HS1 R31_LS1 R32_HS1 R32_LS1 R33_HS1 R33_LS1 R34_HS1 R34_LS1 R35_HS1 R35_LS1 R36_HS1 R36_LS1 R37_HS1 R37_LS1 R38_HS1 R38_LS1 R39_HS1 R39_LS1 R40_HS1 R40_LS1 R41_HS1 R41_LS1 R42_HS1 R42_LS1 R43_HS1 R43_LS1 R44 R45 R46: library part R-4del, "Резистор", Manufacturer=Yageo, ManufacturerPartNumber=RC0805JR-07120R, Power/Voltage=0.125Вт, Tolerance=5%, Specification=K, Type=Резистор
RU1: library part "RU Varistor", "Варистор", Specification=K, Type=Варистор
VD3 VD4 VD5 VD6 VD7 VD8 VD9 VD10 VD11 VD12 VD16 VD17 VD18 VD19 VD20 VD28 VD33 VD34: library part "VD Stabilitron_bidir", "Стабилитрон двусторонний", Specification=K, Type=Стабилитрон
VD15 VD22_HS1 VD22_LS1 VD23_HS1 VD23_LS1 VD24_HS1 VD24_LS1 VD25_HS1 VD25_LS1 VD26_HS1 VD26_LS1 VD29 VD32: library part "VD Stabilitron", "Стабилитрон односторонний", Specification=K, Type=Стабилитрон
VD21_HS1 VD21_LS1 VD27 VD30 VD31: library part "VD Diod", "Диод", Specification=K, Type=Диод
X1 X7: library part XP-PBS-1, "Гнездо 1-контакт", ManufacturerPartNumber=PBS-1-2.54, Specification=K, Type=Розетка
X2 X5: library part XP-PLS-6, "Вилка на 6 контактов", ManufacturerPartNumber=PLS-6-2.54, Specification=K, System=Connector, Type=Вилка
X4 X6 X10 X11 X12 X15: library part XP-PBS-2, "Гнездо 2-контакта", ManufacturerPartNumber=PBS-2-2.54, Specification=K, Type=Розетка
X8: library part XP-PLD-6, "Вилка 6 контактов в 2 ряда", ManufacturerPartNumber=PLD-6-2.54, Specification=K, System=Connector, Type=Вилка
X13 X14 X16 X17: library part "Джампер 2-контакта", "Джампер 2-контакта", ManufacturerPartNumber=PLS-2, Specification=K, Type=Контакты
X18: library part XP-PBS-2, "Гнездо 2-контакта", ManufacturerPartNumber=PBS-2-2.54, Specification=K, Type=Розетка
X19: library part XP-PLS-4, "Вилка на 4 контакта", ManufacturerPartNumber=PLS-4-2.54, Specification=K, Type=Вилка

## Nets (pads, with @x,y where several pads share a name; then routed paths per layer and width w, separated by ;. In a path a pad name is that pad's centre, name@x,y a point inside that pad or via, vN(x,y) a via of type N, cw(c..) or ccw(c..) an arc to the next point about the centre after c; other vN are vias at no path point)
+12_HS1: C25_HS1.1 C25_LS1.1 C29_HS1.1 C29_LS1.1 C30_HS1.1 C30_LS1.1 C35.1 D1.5 R37_HS1.1 R37_LS1.1 R38_HS1.2 R38_LS1.2 R44.2 T1_HS1.4 T1_LS1.4 VD27.2
AIP2H: C14_HS1.2
AIP2L: C1.1 C14_LS1.2 R16.2
EMITTERHS: C2_HS1.2 C3_HS1.2 C6_HS1.1 C7_HS1.1 C8_HS1.2 C13_HS1.2 C14_HS1.1 C16_HS1.1 C21_HS1.2 C22_HS1.1 C23_HS1.1 C24_HS1.1 C26_HS1.2 C27_HS1.2 C28_HS1.2 C40_HS1.2 C41_HS1.1 C42_HS1.1 C43_HS1.2 R29_HS1.1 T1_HS1.6 T1_HS1.7 VD23_HS1.2 VD25_HS1.1 VD33.2 X6.2 X19.2
EMITTERLS: C2_LS1.2 C3_LS1.2 C6_LS1.1 C7_LS1.1 C8_LS1.2 C13_LS1.2 C14_LS1.1 C16_LS1.1 C21_LS1.2 C22_LS1.1 C23_LS1.1 C24_LS1.1 C26_LS1.2 C27_LS1.2 C28_LS1.2 C40_LS1.2 C41_LS1.1 C42_LS1.1 C43_LS1.2 R29_LS1.1 T1_LS1.6 T1_LS1.7 VD23_LS1.2 VD25_LS1.1 VD34.2 X11.2 X19.3
GATEHS: R2.2 R3.2 R5.2 R6.2 VD33.1 X19.1
GATELS: R13.2 R15.2 R47.2 R48.2 VD34.1 X19.4
GND1: C4_HS1.2 C4_LS1.2 C5_HS1.2 C5_LS1.2 C9_HS1.2 C9_LS1.2 C10_HS1.2 C10_LS1.2 C11_HS1.2 C11_LS1.2 C12_HS1.1 C12_LS1.1 C15_HS1.2 C15_LS1.2 C18_HS1.2 C18_LS1.2 C19_HS1.2 C19_LS1.2 C20_HS1.2 C20_LS1.2 C29_HS1.2 C29_LS1.2 C30_HS1.2 C30_LS1.2 C32.2 C33.2 C34.2 C35.2 C37.2 C38.2 C39.2 D1.2 DD1_HS1.2 DD1_LS1.2 DD2_HS1.2 DD2_LS1.2 DD3_HS1.2 DD3_LS1.2 LC1.2 LC2.2 LC3.2 LC4.2 LC5.2 LC6.2 LC7.2 LC8.2 LC9.2 LC10.2 LC11.2 LC12.2 LY1.4 R24_HS1.2 R24_LS1.2 R36_HS1.1 R36_LS1.1 R42_HS1.2 R42_LS1.2 R43_HS1.1 R43_LS1.1 R46.1 VD3.2 VD4.2 VD5.2 VD6.2 VD7.2 VD8.2 VD9.2 VD10.2 VD11.2 VD12.2 VD16.2 VD17.2 VD18.2 VD19.2 VD20.2 VD28.2 VD29.1 VD31.1 X2.1 X5.1 X8.1 X12.2 X15.2
HV+: R1.2 VD21_HS1.2 X1.1
HV-: C1.2 R17.1 VD15.1
INN_HS: R24_HS1.1 X16.1
INN_LS: R24_LS1.1 X13.2
INP_HS: C9_HS1.1 R23_HS1.2 X12.1 X13.1
INP_LS: C9_LS1.1 R23_LS1.2 X15.1 X16.2
ISENSE_HS1_N: C31_HS1.2 R43_HS1.2
ISENSE_HS1_P: C31_HS1.1 R41_HS1.2
ISENSE_LS1_N: C31_LS1.2 R43_LS1.2
ISENSE_LS1_P: C31_LS1.1 R41_LS1.2
NCS_HS: LC11.3 R25_HS1.2 VD20.1
NCS_LS: LC12.3 R25_LS1.2 VD19.1
NetC8_HS1_1: C8_HS1.1 R22_HS1.1
NetC8_LS1_1: C8_LS1.1 R22_LS1.1
NetC10_HS1_1: C10_HS1.1 DD1_HS1.3 LC3.3 R27_HS1.1 VD5.1
NetC10_LS1_1: C10_LS1.1 DD1_LS1.3 LC8.3 R27_LS1.1 VD10.1
NetC11_HS1_1: C11_HS1.1 DD1_HS1.1 R25_HS1.1
NetC11_LS1_1: C11_LS1.1 DD1_LS1.1 R25_LS1.1
NetC12_HS1_2: C12_HS1.2 DD2_HS1.1 R30_HS1.1
NetC12_LS1_2: C12_LS1.2 DD2_LS1.1 R30_LS1.1
NetC13_HS1_1: C13_HS1.1 R8.1 R29_HS1.2 X6.1
NetC13_LS1_1: C13_LS1.1 R18.1 R29_LS1.2 X11.1
NetC15_HS1_1: C15_HS1.1 DD2_HS1.3 R31_HS1.1
NetC15_LS1_1: C15_LS1.1 DD2_LS1.3 R31_LS1.1
NetC18_HS1_1: C18_HS1.1 DD3_HS1.3 R34_HS1.1
NetC18_LS1_1: C18_LS1.1 DD3_LS1.3 R34_LS1.1
NetC19_HS1_1: C19_HS1.1 R36_HS1.2 R37_HS1.2
NetC19_LS1_1: C19_LS1.1 R36_LS1.2 R37_LS1.2
NetC20_HS1_1: C20_HS1.1 DD3_HS1.1 R32_HS1.1
NetC20_LS1_1: C20_LS1.1 DD3_LS1.1 R32_LS1.1
NetC25_HS1_2: C25_HS1.2 R38_HS1.1 VD24_HS1.2
NetC25_LS1_2: C25_LS1.2 R38_LS1.1 VD24_LS1.2
NetC32_1: C32.1 C33.1 C34.1 LY1.3 VD27.1 VD28.1 VD29.2
NetC36_1: C36.1 D1.1 VD30.2
NetC36_2: C36.2 D1.6 L6.1 VD31.2
NetD1_3: D1.3 R45.1 R46.2
NetD1_4: D1.4 R44.1
NetDD1_HS1_4: DD1_HS1.4
NetDD1_HS1_6: DD1_HS1.6
NetDD1_LS1_4: DD1_LS1.4
NetDD1_LS1_6: DD1_LS1.6
NetDD2_HS1_4: DD2_HS1.4
NetDD2_HS1_6: DD2_HS1.6
NetDD2_LS1_4: DD2_LS1.4
NetDD2_LS1_6: DD2_LS1.6
NetDD3_HS1_4: DD3_HS1.4
NetDD3_HS1_6: DD3_HS1.6
NetDD3_LS1_4: DD3_LS1.4
NetDD3_LS1_6: DD3_LS1.6
NetFU1_1: FU1.1 LC13.3
NetFU1_2: FU1.2 LY1.1 RU1.2
NetL1_1: L1.1 X8.4
NetL2_1: L2.1 X8.5
NetL2_2: L2.2 R30_HS1.2 R30_LS1.2 VD17.1
NetL3_1: L3.1 X8.6
NetL3_2: L3.2 R31_HS1.2 R31_LS1.2 VD16.1
NetLC1_1: LC1.1 X2.2
NetLC1_3: LC1.3 R21_HS1.1 VD7.1
NetLC2_1: LC2.1 X2.3
NetLC2_3: LC2.3 R20_HS1.1 VD6.1
NetLC3_1: LC3.1 X2.4
NetLC4_1: LC4.1 X2.5
NetLC5_1: LC5.1 X2.6
NetLC6_1: LC6.1 X5.2
NetLC6_3: LC6.3 R21_LS1.1 VD12.1
NetLC7_1: LC7.1 X5.3
NetLC7_3: LC7.3 R20_LS1.1 VD11.1
NetLC8_1: LC8.1 X5.4
NetLC9_1: LC9.1 X5.5
NetLC10_1: LC10.1 X5.6
NetLC11_1: LC11.1 X8.2
NetLC12_1: LC12.1 X8.3
NetLC13_1: LC13.1 X18.1
NetLC13_2: LC13.2 LY1.2 RU1.1 X18.2
NetR1_1: R1.1 R4.2
NetR2_1: R2.1 R3.1
NetR4_1: R4.1 R7.2
NetR5_1: R5.1 R6.1
NetR7_1: R7.1 R9.2
NetR9_1: R9.1 R11.2
NetR11_1: R11.1 R12.2
NetR12_1: R12.1 R14.2
NetR13_1: R13.1 R47.1
NetR14_1: R14.1 R16.1 R17.2 VD15.2
NetR15_1: R15.1 R48.1
NetR22_HS1_2: R22_HS1.2 VD21_HS1.1
NetR22_LS1_2: R22_LS1.2 VD21_LS1.1
NetR23_HS1_1: R23_HS1.1
NetR23_LS1_1: R23_LS1.1
NetR26_HS1_1: R26_HS1.1
NetR26_HS1_2: R26_HS1.2 R28_HS1.2
NetR26_LS1_1: R26_LS1.1
NetR26_LS1_2: R26_LS1.2 R28_LS1.2
NetR39_HS1_2: R39_HS1.2 R40_HS1.2
NetR39_LS1_2: R39_LS1.2 R40_LS1.2
NetR40_HS1_1: R40_HS1.1 R41_HS1.1 R42_HS1.1
NetR40_LS1_1: R40_LS1.1 R41_LS1.1 R42_LS1.1
NetT1_HS1_1: T1_HS1.1 VD24_HS1.1
NetT1_HS1_5: T1_HS1.5 VD22_HS1.2
NetT1_HS1_8: T1_HS1.8 VD26_HS1.1
NetT1_LS1_1: T1_LS1.1 VD24_LS1.1
NetT1_LS1_5: T1_LS1.5 VD22_LS1.2
NetT1_LS1_8: T1_LS1.8 VD26_LS1.1
NetVD21_LS1_2: VD21_LS1.2 X7.1
OCP_HS1_N: C17_HS1.2 C21_HS1.1 R35_HS1.2
OCP_HS1_P: C16_HS1.2 C17_HS1.1 R33_HS1.2
OCP_LS1_N: C17_LS1.2 C21_LS1.1 R35_LS1.2
OCP_LS1_P: C16_LS1.2 C17_LS1.1 R33_LS1.2
OCPN1H: R10.1 R35_HS1.1 X4.2
OCPN1L: R19.1 R35_LS1.1 X10.2
OCPP1H: R10.2 R33_HS1.1 X4.1
OCPP1L: R19.2 R33_LS1.1 X10.1
SDO_HS1: L1.2 VD18.1
SI1_HS: LC4.3 R32_HS1.2 VD4.1 X14.1
SI1_LS: LC9.3 R32_LS1.2 VD9.1 X17.1
SI2_HS: LC5.3 R34_HS1.2 VD3.1 X17.2
SI2_LS: LC10.3 R34_LS1.2 VD8.1 X14.2
TOUP_HS1: R39_HS1.1
TOUP_LS1: R39_LS1.1
VCC1_HS1: C4_HS1.1 C4_LS1.1 C5_HS1.1 C5_LS1.1 C37.1 C38.1 C39.1 DD1_HS1.5 DD1_LS1.5 DD2_HS1.5 DD2_LS1.5 DD3_HS1.5 DD3_LS1.5 L6.2 R20_HS1.2 R20_LS1.2 R21_HS1.2 R21_LS1.2 R27_HS1.2 R27_LS1.2 R45.2 VD30.1
VCC2_HS1: C2_HS1.1 C3_HS1.1 C26_HS1.1 C27_HS1.1 C28_HS1.1 C41_HS1.2 C43_HS1.1 R8.2 VD25_HS1.2 VD26_HS1.2
VCC2_LS1: C2_LS1.1 C3_LS1.1 C26_LS1.1 C27_LS1.1 C28_LS1.1 C41_LS1.2 C43_LS1.1 R18.2 VD25_LS1.2 VD26_LS1.2
VEE_HS1: C6_HS1.2 C7_HS1.2 C22_HS1.2 C23_HS1.2 C24_HS1.2 C40_HS1.1 C42_HS1.2 R28_HS1.1 VD22_HS1.1 VD23_HS1.1
VEE_LS1: C6_LS1.2 C7_LS1.2 C22_LS1.2 C23_LS1.2 C24_LS1.2 C40_LS1.1 C42_LS1.2 R28_LS1.1 VD22_LS1.1 VD23_LS1.1
pads on no net: T1_HS1.2 T1_HS1.3 T1_LS1.2 T1_LS1.3 VD32.A VD32.K

## Text inside footprints (layer, text, board x,y; h text height)
C29_HS1: Mechanical 15 "+" at 10245,3365 h98.43 r90; Top Overlay "+" at 10245,3365 h98.43 r90
C29_LS1: Mechanical 15 "+" at 10245,4145 h98.43 r90; Top Overlay "+" at 10245,4145 h98.43 r90